# Altium PCB opm.PcbDoc (part 4 of 6)
Units mil, origin at the board's own origin, x right, y up, seen from the top; angles counter-clockwise.
Board outline 4280 x 1445 mil, 4 copper layers (Signal Plane 1, Ground, Power, Signal Plane 2), stack 59.778 mil thick; 104 components, 61 nets, 369 pads, 159 vias.
Unrouted connection lines stored in the file: 4.
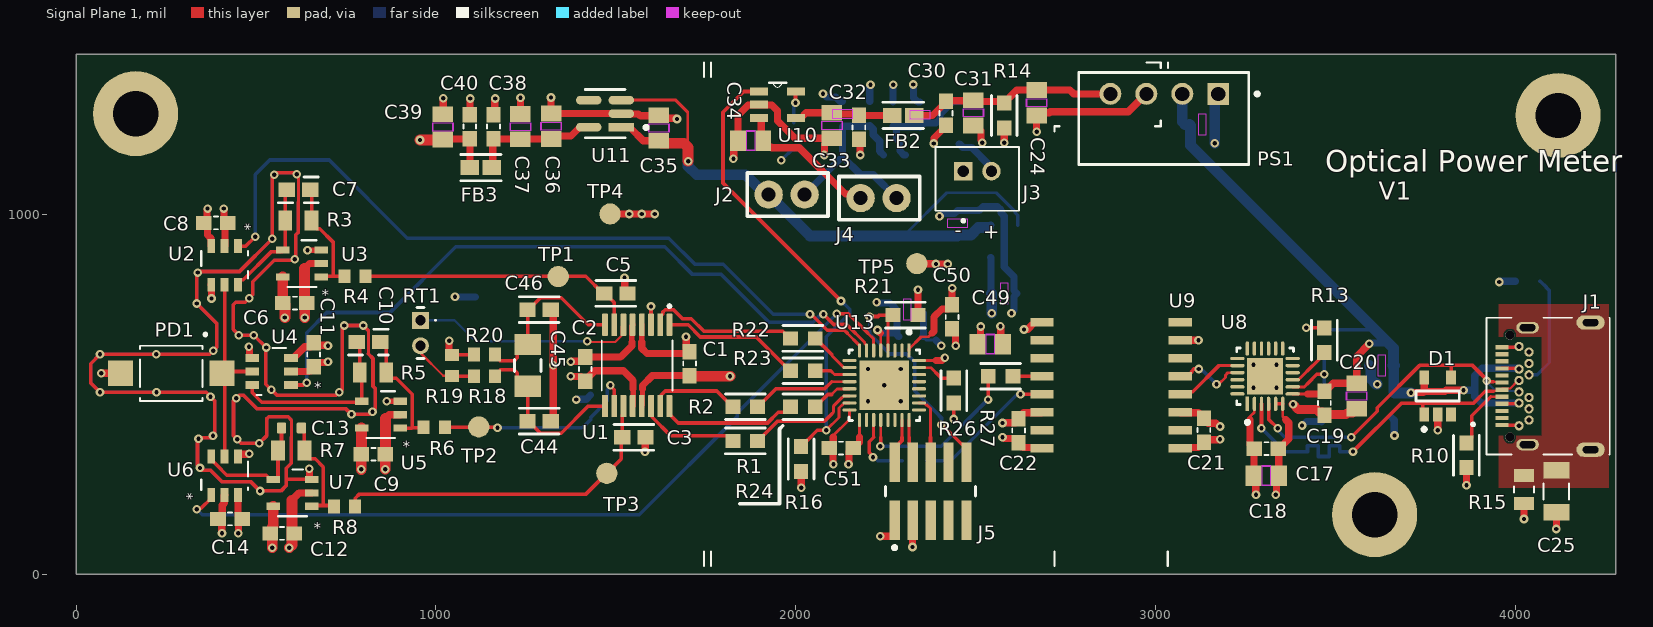
[diagram p0: Signal Plane 1 view]

## Part data (continued)
R12: library part RC0603FR-0747K5L, "100mW Thick Film Resistors 75V ±100ppm/℃ ±1% 47.5kΩ 0603 Chip Resistor - Surface Mount ROHS", Case Code (Imperial)=0603, Manufacturer="Yageo Group", Max Operating Temperature=155°C, Max Power Dissipation=100mW, Min Operating Temperature=-55°C, Supplier Part Number=311-47.5KHRCT-ND, Temperature Coefficient=100ppm/°C, Tolerance=1%, Voltage Rating=75V, Voltage Rating (DC)=50V, Case/Package=0603, Category="Chip SMD Resistors", China RoHS=Non-Compliant, ComponentLink1Description=https://datasheet.octopart.com:443/RC0603FR-0747K5L-Yageo-datasheet-175887523.pdf?src-supplier=IHS, ComponentLink1URL=https://datasheet.octopart.com:443/RC0603FR-0747K5L-Yageo-datasheet-175887523.pdf?src-supplier=IHS, ComponentLink2Description=https://datasheet.octopart.com:443/RC0603FR-0747K5L-Yageo-datasheet-103092701.pdf?src-supplier=Upverter, ComponentLink2URL=https://datasheet.octopart.com:443/RC0603FR-0747K5L-Yageo-datasheet-103092701.pdf?src-supplier=Upverter, ComponentLink3Description=https://datasheet.octopart.com:443/RC0603FR-0747K5L-Yageo-Group-datasheet-190305687.pdf?src-supplier=Newark, ComponentLink3URL=https://datasheet.octopart.com:443/RC0603FR-0747K5L-Yageo-Group-datasheet-190305687.pdf?src-supplier=Newark, ComponentLink4Description=https://datasheet.octopart.com:443/RC0603FR-0747K5L-Yageo-datasheet-8328172.pdf?src-supplier=Farnell, ComponentLink4URL=https://datasheet.octopart.com:443/RC0603FR-0747K5L-Yageo-datasheet-8328172.pdf?src-supplier=Farnell, ComponentLink5Description=https://datasheet.octopart.com:443/RC0603FR-0747K5L-Yageo-datasheet-62067350.pdf?src-supplier=Farnell, ComponentLink5URL=https://datasheet.octopart.com:443/RC0603FR-0747K5L-Yageo-datasheet-62067350.pdf?src-supplier=Farnell, ComponentLink6Description=https://datasheet.octopart.com:443/RC0603FR-0747K5L-Yageo-datasheet-34211833.pdf?src-supplier=element14+APAC, ComponentLink6URL=https://datasheet.octopart.com:443/RC0603FR-0747K5L-Yageo-datasheet-34211833.pdf?src-supplier=element14+APAC, ComponentLink7Description=https://datasheet.octopart.com:443/RC0603FR-0747K5L-Yageo-Group-datasheet-176638170.pdf?src-supplier=Future+Electronics, ComponentLink7URL=https://datasheet.octopart.com:443/RC0603FR-0747K5L-Yageo-Group-datasheet-176638170.pdf?src-supplier=Future+Electronics, ComponentLink8Description=https://datasheet.octopart.com:443/RC0603FR-0747K5L-Yageo-datasheet-164759695.pdf?src-supplier=Future+Electronics, ComponentLink8URL=https://datasheet.octopart.com:443/RC0603FR-0747K5L-Yageo-datasheet-164759695.pdf?src-supplier=Future+Electronics, ComponentLink9Description=https://datasheet.octopart.com:443/RC0603FR-0747K5L-Yageo-datasheet-137700087.pdf?src-supplier=Future+Electronics, ComponentLink9URL=https://datasheet.octopart.com:443/RC0603FR-0747K5L-Yageo-datasheet-137700087.pdf?src-supplier=Future+Electronics, ComponentLink10Description=https://datasheet.octopart.com:443/RC0603FR-0747K5L-Yageo-datasheet-27584510.pdf?src-supplier=Future+Electronics, ComponentLink10URL=https://datasheet.octopart.com:443/RC0603FR-0747K5L-Yageo-datasheet-27584510.pdf?src-supplier=Future+Electronics, ComponentLink11Description=https://datasheet.octopart.com:443/RC0603FR-0747K5L-Yageo-datasheet-15599030.pdf?src-supplier=Future+Electronics, ComponentLink11URL=https://datasheet.octopart.com:443/RC0603FR-0747K5L-Yageo-datasheet-15599030.pdf?src-supplier=Future+Electronics, ComponentLink12Description=https://datasheet.octopart.com:443/RC0603FR-0747K5L-Yageo-datasheet-12596169.pdf?src-supplier=Future+Electronics, ComponentLink12URL=https://datasheet.octopart.com:443/RC0603FR-0747K5L-Yageo-datasheet-12596169.pdf?src-supplier=Future+Electronics, ComponentLink13Description=https://datasheet.octopart.com:443/RC0603FR-0747K5L-Yageo-datasheet-503470.pdf?src-supplier=Future+Electronics, ComponentLink13URL=https://datasheet.octopart.com:443/RC0603FR-0747K5L-Yageo-datasheet-503470.pdf?src-supplier=Future+Electronics, ComponentLink14Description=https://datasheet.octopart.com:443/RC0603FR-0747K5L-Yageo-datasheet-148775077.pdf?src-supplier=TME, ComponentLink14URL=https://datasheet.octopart.com:443/RC0603FR-0747K5L-Yageo-datasheet-148775077.pdf?src-supplier=TME, ComponentLink15Description=https://datasheet.octopart.com/RC0603FR-0747K5L-Yageo-datasheet-73766026.pdf, ComponentLink15URL=https://datasheet.octopart.com/RC0603FR-0747K5L-Yageo-datasheet-73766026.pdf, ComponentLink16Description=https://datasheet.octopart.com:443/RC0603FR-0747K5L-Yageo-datasheet-118562.pdf?src-supplier=DigiKey, ComponentLink16URL=https://datasheet.octopart.com:443/RC0603FR-0747K5L-Yageo-datasheet-118562.pdf?src-supplier=DigiKey, ComponentLink17Description=http://sigma.octopart.com:80/conflict_mineral_statement/Yageo-company-3.pdf?src-supplier=Compliance+Statements, ComponentLink17URL=http://sigma.octopart.com:80/conflict_mineral_statement/Yageo-company-3.pdf?src-supplier=Compliance+Statements, ComponentLink18Description=http://sigma.octopart.com:80/rohs_statement/Yageo-company-2.pdf?src-supplier=Compliance+Statements, ComponentLink18URL=http://sigma.octopart.com:80/rohs_statement/Yageo-company-2.pdf?src-supplier=Compliance+Statements, Composition="Thick Film", Country of Origin="Mainland China, Taiwan", Depth=800µm, Export Control Classification Number (ECCN) Code=EAR99, Features="Moisture Resistant", Harmonized Tariff Schedule (HTS) Code=8533.21.00.30, Height=450µm, Introduction Date=2004-09-22, Lead Free="Lead Free", Length=1.6mm, Lifecycle Status=Production, Manufacturer Part Number=RC0603FR-0747K5L, Military Standard=Not, Mounting Technology="Surface Mount", Number of Terminals=2, Number of Terminations=2, Packaging="Tape & Reel", Pins=2, Power Dissipation=100mW, Power Rating=100mW, Pricing="1=0.11, 10=0.008, 25=0.0076, 50=0.0072, 100=0.0068, 250=0.00568 (USD)", REACH SVHC=Yes, RoHS=Compliant, Schedule B="8533210045, 8533210045|8533210045|8533210045|8533210045|8533210045|8533210045|8533210045|8533210045|8533210045|8533210045|8533210045|8533210045|8533210045|8533210045|8533210045, 8533210045|8533210045|8533210045|8533210045|8533210045|8533210045|8533210045|8533210045|8533210045|8533210045|8533210045|8533210045|8533210045|8533210045|8533210045|8533210045, 8533210045|8533210045|8533210045|8533210045|8533210045|8533210045|8533210045|8533210045|8533210045|8533210045|8533210045|8533210045|8533210045|8533210045|8533210045|8533210045|8533210045", Stock=42231, Supplier=DigiKey, Supplier 1=DigiKey, Supplier Part Number 1=311-47.5KHRCT-ND, Termination=SMD/SMT, Width=800µm, Working Voltage=75V
R13 R14: library part RC0603FR-071KL, "100mW Thick Film Resistors 75V ±100ppm/℃ ±1% 1kΩ 0603 Chip Resistor - Surface Mount ROHS", Case Code (Imperial)=0603, Manufacturer="Yageo Group", Max Operating Temperature=155°C, Min Operating Temperature=-55°C, Power Dissipation=100mW, Supplier Part Number=311-1.00KHRCT-ND, Temperature Coefficient=100ppm/°C, Tolerance=1%, Voltage Rating=50V, Working Voltage=75V, Case Code (Metric)=0603, Case/Package=0603, Category="Chip SMD Resistors", China RoHS=Non-Compliant, ComponentLink1Description=https://datasheet.octopart.com:443/RC0603FR-071KL-Yageo-datasheet-175887523.pdf?src-supplier=Newark, ComponentLink1URL=https://datasheet.octopart.com:443/RC0603FR-071KL-Yageo-datasheet-175887523.pdf?src-supplier=Newark, ComponentLink2Description=https://datasheet.octopart.com:443/RC0603FR-071KL-Yageo-datasheet-34211833.pdf?src-supplier=Newark, ComponentLink2URL=https://datasheet.octopart.com:443/RC0603FR-071KL-Yageo-datasheet-34211833.pdf?src-supplier=Newark, ComponentLink3Description=https://datasheet.octopart.com:443/RC0603FR-071KL-Yageo-datasheet-12596169.pdf?src-supplier=Newark, ComponentLink3URL=https://datasheet.octopart.com:443/RC0603FR-071KL-Yageo-datasheet-12596169.pdf?src-supplier=Newark, ComponentLink4Description=https://datasheet.octopart.com:443/RC0603FR-071KL-Yageo-datasheet-499455.pdf?src-supplier=Newark, ComponentLink4URL=https://datasheet.octopart.com:443/RC0603FR-071KL-Yageo-datasheet-499455.pdf?src-supplier=Newark, ComponentLink5Description=https://datasheet.octopart.com:443/RC0603FR-071KL-Yageo-datasheet-503470.pdf?src-supplier=Newark, ComponentLink5URL=https://datasheet.octopart.com:443/RC0603FR-071KL-Yageo-datasheet-503470.pdf?src-supplier=Newark, ComponentLink6Description=https://datasheet.octopart.com:443/RC0603FR-071KL-Yageo-datasheet-62067350.pdf?src-supplier=element14+APAC, ComponentLink6URL=https://datasheet.octopart.com:443/RC0603FR-071KL-Yageo-datasheet-62067350.pdf?src-supplier=element14+APAC, ComponentLink7Description=https://datasheet.octopart.com:443/RC0603FR-071KL-Yageo-datasheet-21426514.pdf?src-supplier=element14+APAC, ComponentLink7URL=https://datasheet.octopart.com:443/RC0603FR-071KL-Yageo-datasheet-21426514.pdf?src-supplier=element14+APAC, ComponentLink8Description=https://datasheet.octopart.com:443/RC0603FR-071KL-Yageo-datasheet-141265859.pdf?src-supplier=Upverter, ComponentLink8URL=https://datasheet.octopart.com:443/RC0603FR-071KL-Yageo-datasheet-141265859.pdf?src-supplier=Upverter, ComponentLink9Description=https://datasheet.octopart.com:443/RC0603FR-071KL-Yageo-datasheet-103092701.pdf?src-supplier=Upverter, ComponentLink9URL=https://datasheet.octopart.com:443/RC0603FR-071KL-Yageo-datasheet-103092701.pdf?src-supplier=Upverter, ComponentLink10Description=https://sigma.octopart.com:443/138820526/technical_drawing/Yageo-RC0603FR-071KL.pdf?src-supplier=Upverter, ComponentLink10URL=https://sigma.octopart.com:443/138820526/technical_drawing/Yageo-RC0603FR-071KL.pdf?src-supplier=Upverter, ComponentLink11Description=https://datasheet.octopart.com:443/RC0603FR-071KL-Yageo-datasheet-68297981.pdf?src-supplier=Upverter, ComponentLink11URL=https://datasheet.octopart.com:443/RC0603FR-071KL-Yageo-datasheet-68297981.pdf?src-supplier=Upverter, ComponentLink12Description=https://datasheet.octopart.com:443/RC0603FR-071KL-Yageo-datasheet-8328172.pdf?src-supplier=Farnell, ComponentLink12URL=https://datasheet.octopart.com:443/RC0603FR-071KL-Yageo-datasheet-8328172.pdf?src-supplier=Farnell, ComponentLink13Description=https://datasheet.octopart.com:443/RC0603FR-071KL-Yageo-datasheet-13691069.pdf?src-supplier=Farnell, ComponentLink13URL=https://datasheet.octopart.com:443/RC0603FR-071KL-Yageo-datasheet-13691069.pdf?src-supplier=Farnell, ComponentLink14Description=https://datasheet.octopart.com:443/RC0603FR-071KL-Yageo-datasheet-15599030.pdf?src-supplier=Seeed+Studio, ComponentLink14URL=https://datasheet.octopart.com:443/RC0603FR-071KL-Yageo-datasheet-15599030.pdf?src-supplier=Seeed+Studio, ComponentLink15Description=https://datasheet.octopart.com:443/RC0603FR-071KL-Yageo-Group-datasheet-176638170.pdf?src-supplier=Future+Electronics, ComponentLink15URL=https://datasheet.octopart.com:443/RC0603FR-071KL-Yageo-Group-datasheet-176638170.pdf?src-supplier=Future+Electronics, ComponentLink16Description=https://datasheet.octopart.com:443/RC0603FR-071KL-Yageo-datasheet-164759695.pdf?src-supplier=Future+Electronics, ComponentLink16URL=https://datasheet.octopart.com:443/RC0603FR-071KL-Yageo-datasheet-164759695.pdf?src-supplier=Future+Electronics, ComponentLink17Description=https://datasheet.octopart.com:443/RC0603FR-071KL-Yageo-datasheet-137700087.pdf?src-supplier=Future+Electronics, ComponentLink17URL=https://datasheet.octopart.com:443/RC0603FR-071KL-Yageo-datasheet-137700087.pdf?src-supplier=Future+Electronics, ComponentLink18Description=https://datasheet.octopart.com:443/RC0603FR071KL-Yageo-datasheet-27584510.pdf?src-supplier=Future+Electronics, ComponentLink18URL=https://datasheet.octopart.com:443/RC0603FR071KL-Yageo-datasheet-27584510.pdf?src-supplier=Future+Electronics, ComponentLink19Description=https://datasheet.octopart.com:443/RC0603FR-071KL-Yageo-datasheet-8324193.pdf?src-supplier=Future+Electronics, ComponentLink19URL=https://datasheet.octopart.com:443/RC0603FR-071KL-Yageo-datasheet-8324193.pdf?src-supplier=Future+Electronics, ComponentLink20Description=https://datasheet.octopart.com:443/RC0603FR-071KL-Yageo-datasheet-79472498.pdf?src-supplier=Megastar, ComponentLink20URL=https://datasheet.octopart.com:443/RC0603FR-071KL-Yageo-datasheet-79472498.pdf?src-supplier=Megastar, ComponentLink21Description=https://datasheet.octopart.com/RC0603FR-071KL-Yageo-datasheet-73766026.pdf, ComponentLink21URL=https://datasheet.octopart.com/RC0603FR-071KL-Yageo-datasheet-73766026.pdf, ComponentLink22Description=https://datasheet.octopart.com:443/RC0603FR-071KL-Yageo-datasheet-118562.pdf?src-supplier=DigiKey, ComponentLink22URL=https://datasheet.octopart.com:443/RC0603FR-071KL-Yageo-datasheet-118562.pdf?src-supplier=DigiKey, ComponentLink23Description=http://sigma.octopart.com:80/conflict_mineral_statement/Yageo-company-3.pdf?src-supplier=Compliance+Statements, ComponentLink23URL=http://sigma.octopart.com:80/conflict_mineral_statement/Yageo-company-3.pdf?src-supplier=Compliance+Statements, ComponentLink24Description=http://sigma.octopart.com:80/rohs_statement/Yageo-company-2.pdf?src-supplier=Compliance+Statements, ComponentLink24URL=http://sigma.octopart.com:80/rohs_statement/Yageo-company-2.pdf?src-supplier=Compliance+Statements, Composition="Thick Film", Contact Plating=Tin, Country of Origin="Mainland China, Taiwan", Depth=800µm, Export Control Classification Number (ECCN) Code=EAR99, Harmonized Tariff Schedule (HTS) Code=8533.21.00.30, Height=450µm, Introduction Date=2004-10-04, Lead Free="Lead Free", Length=1.6mm, Lifecycle Status=Production, Manufacturer Part Number=RC0603FR-071KL, Military Standard=Not, Mounting Technology="Surface Mount", Number of Terminals=2, Packaging="Tape and Reel", Pins=2, Power Rating=100mW, Pricing="1=0.1, 10=0.008, 25=0.0072, 50=0.0062, 100=0.0057, 5000=0.00204 (USD)", Radiation Hardening=No, REACH SVHC=Yes, RoHS=Compliant, Schedule B="8533210045, 8533210045|8533210045|8533210045|8533210045|8533210045|8533210045|8533210045|8533210045|8533210045|8533210045|8533210045|8533210045|8533210045|8533210045|8533210045|8533210045|8533210045|8533210045|8533210045|8533210045|8533210045|8533210045|8533210045|85", Stock=5298268, Supplier=DigiKey, Supplier 1=DigiKey, Supplier Part Number 1=311-1.00KHRCT-ND, Termination=SMD/SMT, Voltage Rating (DC)=50V, Width=800µm
R15: library part CRCW08051M00FKEA, "Res Thick Film 0805 1M Ohm 1% 0.125W(1/8W) +/-100ppm/ßC Pad SMD Automotive T/R", Case Code (Metric)=0805, Manufacturer=Vishay, Manufacturer Package Identifier=CRCW0805-e3, Max Operating Temperature=155°C, Min Operating Temperature=-55°C, Power Dissipation=125mW, Supplier Part Number=541-1.00MCCT-ND, Temperature Coefficient=100ppm/°C, Tolerance=1%, Voltage Rating=150V, Case/Package=0805, Category="Chip SMD Resistors", China RoHS=Non-Compliant, ComponentLink1Description=https://datasheet.octopart.com:443/CRCW08051M00FKEA-Vishay-datasheet-175423584.pdf?src-supplier=Newark, ComponentLink1URL=https://datasheet.octopart.com:443/CRCW08051M00FKEA-Vishay-datasheet-175423584.pdf?src-supplier=Newark, ComponentLink2Description=https://datasheet.octopart.com:443/CRCW08051M00FKEA-Vishay-datasheet-83961561.pdf?src-supplier=Newark, ComponentLink2URL=https://datasheet.octopart.com:443/CRCW08051M00FKEA-Vishay-datasheet-83961561.pdf?src-supplier=Newark, ComponentLink3Description=https://datasheet.octopart.com:443/CRCW08051M00FKEA-Vishay-datasheet-62317937.pdf?src-supplier=Newark, ComponentLink3URL=https://datasheet.octopart.com:443/CRCW08051M00FKEA-Vishay-datasheet-62317937.pdf?src-supplier=Newark, ComponentLink4Description=https://datasheet.octopart.com:443/CRCW08051M00FKEA-Vishay-datasheet-11516975.pdf?src-supplier=Newark, ComponentLink4URL=https://datasheet.octopart.com:443/CRCW08051M00FKEA-Vishay-datasheet-11516975.pdf?src-supplier=Newark, ComponentLink5Description=https://datasheet.octopart.com:443/CRCW08051M00FKEA-Vishay-datasheet-41302739.pdf?src-supplier=Newark, ComponentLink5URL=https://datasheet.octopart.com:443/CRCW08051M00FKEA-Vishay-datasheet-41302739.pdf?src-supplier=Newark, ComponentLink6Description=https://datasheet.octopart.com:443/CRCW08051M00FKEA-Vishay-datasheet-33013972.pdf?src-supplier=Newark, ComponentLink6URL=https://datasheet.octopart.com:443/CRCW08051M00FKEA-Vishay-datasheet-33013972.pdf?src-supplier=Newark, ComponentLink7Description=https://datasheet.octopart.com:443/CRCW08051M00FKEA-Vishay-datasheet-141435152.pdf?src-supplier=Upverter, ComponentLink7URL=https://datasheet.octopart.com:443/CRCW08051M00FKEA-Vishay-datasheet-141435152.pdf?src-supplier=Upverter, ComponentLink8Description=https://datasheet.octopart.com:443/CRCW08051M00FKEA-Vishay-datasheet-66077789.pdf?src-supplier=element14+APAC, ComponentLink8URL=https://datasheet.octopart.com:443/CRCW08051M00FKEA-Vishay-datasheet-66077789.pdf?src-supplier=element14+APAC, ComponentLink9Description=https://datasheet.octopart.com:443/CRCW08051M00FKEA-Vishay-datasheet-16179825.pdf?src-supplier=element14+APAC, ComponentLink9URL=https://datasheet.octopart.com:443/CRCW08051M00FKEA-Vishay-datasheet-16179825.pdf?src-supplier=element14+APAC, ComponentLink10Description=https://datasheet.octopart.com:443/CRCW08051M00FKEA-Vishay-datasheet-14722531.pdf?src-supplier=Farnell, ComponentLink10URL=https://datasheet.octopart.com:443/CRCW08051M00FKEA-Vishay-datasheet-14722531.pdf?src-supplier=Farnell, ComponentLink11Description=https://datasheet.octopart.com:443/CRCW08051M00FKEA-Vishay-datasheet-10882403.pdf?src-supplier=Farnell, ComponentLink11URL=https://datasheet.octopart.com:443/CRCW08051M00FKEA-Vishay-datasheet-10882403.pdf?src-supplier=Farnell, ComponentLink12Description=https://datasheet.octopart.com:443/CRCW08051M00FKEA-Vishay-datasheet-5300368.pdf?src-supplier=Future+Electronics, ComponentLink12URL=https://datasheet.octopart.com:443/CRCW08051M00FKEA-Vishay-datasheet-5300368.pdf?src-supplier=Future+Electronics, ComponentLink13Description=https://datasheet.octopart.com:443/CRCW08051M00FKEA-Vishay-datasheet-62316122.pdf?src-supplier=Future+Electronics, ComponentLink13URL=https://datasheet.octopart.com:443/CRCW08051M00FKEA-Vishay-datasheet-62316122.pdf?src-supplier=Future+Electronics, ComponentLink14Description=https://datasheet.octopart.com:443/CRCW08051M00FKEA-Vishay-Dale-datasheet-47688880.pdf?src-supplier=RS+(Formerly+Allied+Electronics), ComponentLink14URL=https://datasheet.octopart.com:443/CRCW08051M00FKEA-Vishay-Dale-datasheet-47688880.pdf?src-supplier=RS+(Formerly+Allied+Electronics), ComponentLink15Description=https://datasheet.octopart.com:443/CRCW08051M00FKEA-Vishay-datasheet-12001583.pdf?src-supplier=RS+(Formerly+Allied+Electronics), ComponentLink15URL=https://datasheet.octopart.com:443/CRCW08051M00FKEA-Vishay-datasheet-12001583.pdf?src-supplier=RS+(Formerly+Allied+Electronics), ComponentLink16Description=https://datasheet.octopart.com:443/CRCW08051M00FKEA-Vishay-datasheet-5306405.pdf?src-supplier=RS+(Formerly+Allied+Electronics), ComponentLink16URL=https://datasheet.octopart.com:443/CRCW08051M00FKEA-Vishay-datasheet-5306405.pdf?src-supplier=RS+(Formerly+Allied+Electronics), ComponentLink17Description=https://datasheet.octopart.com:443/CRCW08051M00FKEA-Vishay-datasheet-17834126.pdf?src-supplier=TME, ComponentLink17URL=https://datasheet.octopart.com:443/CRCW08051M00FKEA-Vishay-datasheet-17834126.pdf?src-supplier=TME, ComponentLink18Description=https://datasheet.octopart.com/D-CRCW-e3-Standard-Thick-Film-Chip-Resistors-Vishay-datasheet-family-64.pdf, ComponentLink18URL=https://datasheet.octopart.com/D-CRCW-e3-Standard-Thick-Film-Chip-Resistors-Vishay-datasheet-family-64.pdf, ComponentLink19Description=https://datasheet.octopart.com:443/CRCW08051M00FKEA-Vishay-datasheet-8445837.pdf?src-supplier=element14, ComponentLink19URL=https://datasheet.octopart.com:443/CRCW08051M00FKEA-Vishay-datasheet-8445837.pdf?src-supplier=element14, ComponentLink20Description=https://datasheet.octopart.com:443/CRCW08051M00FKEA-Vishay-datasheet-5377306.pdf?src-supplier=Garrett, ComponentLink20URL=https://datasheet.octopart.com:443/CRCW08051M00FKEA-Vishay-datasheet-5377306.pdf?src-supplier=Garrett, ComponentLink21Description=https://datasheet.octopart.com:443/CRCW08051M00FKEA-Vishay-datasheet-148188.pdf?src-supplier=Garrett, ComponentLink21URL=https://datasheet.octopart.com:443/CRCW08051M00FKEA-Vishay-datasheet-148188.pdf?src-supplier=Garrett, ComponentLink22Description=https://datasheet.octopart.com:443/CRCW08051M00FKEA-Vishay-datasheet-34203.pdf?src-supplier=Garrett, ComponentLink22URL=https://datasheet.octopart.com:443/CRCW08051M00FKEA-Vishay-datasheet-34203.pdf?src-supplier=Garrett, ComponentLink23Description=http://sigma.octopart.com:80/rohs_certificate/D-CRCW-e3-Standard-Thick-Film-Chip-Resistors-Vishay-family-102.pdf?src-supplier=Compliance+Statements, ComponentLink23URL=http://sigma.octopart.com:80/rohs_certificate/D-CRCW-e3-Standard-Thick-Film-Chip-Resistors-Vishay-family-102.pdf?src-supplier=Compliance+Statements, Composition="Thick Film", Country of Origin=Israel, Export Control Classification Number (ECCN) Code=EAR99, Harmonized Tariff Schedule (HTS) Code=8533.21.00.30, Height=450µm, Introduction Date=2005-02-16, Lead Free="Lead Free", Length=2mm, Lifecycle Status=Production, Manufacturer Part Number=CRCW08051M00FKEA, Mounting Technology="Surface Mount", Number of Terminals=2, Packaging="Cut Tape", Pins=2, Power Rating=125mW, Pricing="1=0.1, 10=0.041, 25=0.0312, 50=0.0256, 100=0.0212, 250=0.01692, 500=0.01448, 1000=0.01254 (USD)", REACH SVHC=Yes, RoHS=Compliant, Schedule B="8533210045, 8533210045|8533210045|8533210045|8533210045|8533210045|8533210045|8533210045|8533210045|8533210045|8533210045|8533210045|8533210045|8533210045|8533210045|8533210045|8533210045|8533210045|8533210045|8533210045|8533210045|8533210045|8533210045|8533210045|85", Stock=136752, Supplier=DigiKey, Supplier 1=Avnet, Supplier Part Number 1=CRCW08051M00FKEA, Voltage Rating (DC)=150V, Width=1.25mm, Working Voltage=150V
R16 R21 R26: library part RC0603FR-0710KL, "100mW Thick Film Resistors 75V ±100ppm/℃ ±1% 10kΩ 0603 Chip Resistor - Surface Mount ROHS", Case Code (Imperial)=0603, Manufacturer="Yageo Group", Max Operating Temperature=155°C, Min Operating Temperature=-55°C, Power Dissipation=100mW, Supplier Part Number=311-10.0KHRCT-ND, Temperature Coefficient=100ppm/°C, Tolerance=1%, Voltage Rating=75V, Voltage Rating (DC)=50V, Case Code (Metric)=0603, Case/Package=0603, Category="Chip SMD Resistors", China RoHS=Non-Compliant, ComponentLink1Description=https://datasheet.octopart.com:443/RC0603FR-0710KL-Yageo-datasheet-175887523.pdf?src-supplier=IHS, ComponentLink1URL=https://datasheet.octopart.com:443/RC0603FR-0710KL-Yageo-datasheet-175887523.pdf?src-supplier=IHS, ComponentLink2Description=https://datasheet.octopart.com:443/RC0603FR-0710KL-Yageo-datasheet-103092701.pdf?src-supplier=Upverter, ComponentLink2URL=https://datasheet.octopart.com:443/RC0603FR-0710KL-Yageo-datasheet-103092701.pdf?src-supplier=Upverter, ComponentLink3Description=https://datasheet.octopart.com:443/RC0603FR-0710KL-Yageo-datasheet-98239111.pdf?src-supplier=Upverter, ComponentLink3URL=https://datasheet.octopart.com:443/RC0603FR-0710KL-Yageo-datasheet-98239111.pdf?src-supplier=Upverter, ComponentLink4Description=https://datasheet.octopart.com:443/RC0603FR-0710KL-Yageo-datasheet-141265859.pdf?src-supplier=Upverter, ComponentLink4URL=https://datasheet.octopart.com:443/RC0603FR-0710KL-Yageo-datasheet-141265859.pdf?src-supplier=Upverter, ComponentLink5Description=https://sigma.octopart.com:443/138820526/technical_drawing/Yageo-RC0603FR-0710KL.pdf?src-supplier=Upverter, ComponentLink5URL=https://sigma.octopart.com:443/138820526/technical_drawing/Yageo-RC0603FR-0710KL.pdf?src-supplier=Upverter, ComponentLink6Description=https://datasheet.octopart.com:443/RC0603FR-0710KL-Yageo-datasheet-8328172.pdf?src-supplier=Farnell, ComponentLink6URL=https://datasheet.octopart.com:443/RC0603FR-0710KL-Yageo-datasheet-8328172.pdf?src-supplier=Farnell, ComponentLink7Description=https://datasheet.octopart.com:443/RC0603FR-0710KL-Yageo-datasheet-13691069.pdf?src-supplier=Farnell, ComponentLink7URL=https://datasheet.octopart.com:443/RC0603FR-0710KL-Yageo-datasheet-13691069.pdf?src-supplier=Farnell, ComponentLink8Description=https://datasheet.octopart.com:443/RC0603FR-0710KL-Yageo-datasheet-62067350.pdf?src-supplier=element14+APAC, ComponentLink8URL=https://datasheet.octopart.com:443/RC0603FR-0710KL-Yageo-datasheet-62067350.pdf?src-supplier=element14+APAC, ComponentLink9Description=https://datasheet.octopart.com:443/RC0603FR-0710KL-Yageo-datasheet-17842380.pdf?src-supplier=element14+APAC, ComponentLink9URL=https://datasheet.octopart.com:443/RC0603FR-0710KL-Yageo-datasheet-17842380.pdf?src-supplier=element14+APAC, ComponentLink10Description=https://datasheet.octopart.com:443/RC0603FR-0710KL-Yageo-datasheet-15599030.pdf?src-supplier=Future+Electronics, ComponentLink10URL=https://datasheet.octopart.com:443/RC0603FR-0710KL-Yageo-datasheet-15599030.pdf?src-supplier=Future+Electronics, ComponentLink11Description=https://datasheet.octopart.com:443/RC0603FR-0710KL-Yageo-Group-datasheet-176638170.pdf?src-supplier=Future+Electronics, ComponentLink11URL=https://datasheet.octopart.com:443/RC0603FR-0710KL-Yageo-Group-datasheet-176638170.pdf?src-supplier=Future+Electronics, ComponentLink12Description=https://datasheet.octopart.com:443/RC0603FR-0710KL-Yageo-datasheet-164759695.pdf?src-supplier=Future+Electronics, ComponentLink12URL=https://datasheet.octopart.com:443/RC0603FR-0710KL-Yageo-datasheet-164759695.pdf?src-supplier=Future+Electronics, ComponentLink13Description=https://datasheet.octopart.com:443/RC0603FR-0710KL-Yageo-datasheet-127823281.pdf?src-supplier=Future+Electronics, ComponentLink13URL=https://datasheet.octopart.com:443/RC0603FR-0710KL-Yageo-datasheet-127823281.pdf?src-supplier=Future+Electronics, ComponentLink14Description=https://datasheet.octopart.com:443/RC0603FR-0710KL-Yageo-datasheet-137700087.pdf?src-supplier=Future+Electronics, ComponentLink14URL=https://datasheet.octopart.com:443/RC0603FR-0710KL-Yageo-datasheet-137700087.pdf?src-supplier=Future+Electronics, ComponentLink15Description=https://datasheet.octopart.com:443/RC0603FR-0710KL-Yageo-datasheet-27584510.pdf?src-supplier=Future+Electronics, ComponentLink15URL=https://datasheet.octopart.com:443/RC0603FR-0710KL-Yageo-datasheet-27584510.pdf?src-supplier=Future+Electronics, ComponentLink16Description=https://datasheet.octopart.com:443/RC0603FR-0710KL-Yageo-datasheet-8324193.pdf?src-supplier=Future+Electronics, ComponentLink16URL=https://datasheet.octopart.com:443/RC0603FR-0710KL-Yageo-datasheet-8324193.pdf?src-supplier=Future+Electronics, ComponentLink17Description=https://datasheet.octopart.com:443/RC0603FR-0710KL-Yageo-datasheet-12596169.pdf?src-supplier=Newark, ComponentLink17URL=https://datasheet.octopart.com:443/RC0603FR-0710KL-Yageo-datasheet-12596169.pdf?src-supplier=Newark, ComponentLink18Description=https://datasheet.octopart.com:443/RC0603FR-0710KL-Yageo-datasheet-503470.pdf?src-supplier=Newark, ComponentLink18URL=https://datasheet.octopart.com:443/RC0603FR-0710KL-Yageo-datasheet-503470.pdf?src-supplier=Newark, ComponentLink19Description=https://datasheet.octopart.com:443/RC0603FR-0710KL-Yageo-datasheet-34211833.pdf?src-supplier=Newark, ComponentLink19URL=https://datasheet.octopart.com:443/RC0603FR-0710KL-Yageo-datasheet-34211833.pdf?src-supplier=Newark, ComponentLink20Description=https://datasheet.octopart.com:443/RC0603FR-0710KL-Yageo-datasheet-79472498.pdf?src-supplier=Megastar, ComponentLink20URL=https://datasheet.octopart.com:443/RC0603FR-0710KL-Yageo-datasheet-79472498.pdf?src-supplier=Megastar, ComponentLink21Description=https://datasheet.octopart.com/RC0603FR-0710KL-Yageo-datasheet-73766026.pdf, ComponentLink21URL=https://datasheet.octopart.com/RC0603FR-0710KL-Yageo-datasheet-73766026.pdf, ComponentLink22Description=https://datasheet.octopart.com:443/RC0603FR-0710KL-Yageo-datasheet-118562.pdf?src-supplier=DigiKey, ComponentLink22URL=https://datasheet.octopart.com:443/RC0603FR-0710KL-Yageo-datasheet-118562.pdf?src-supplier=DigiKey, ComponentLink23Description=http://sigma.octopart.com:80/conflict_mineral_statement/Yageo-company-3.pdf?src-supplier=Compliance+Statements, ComponentLink23URL=http://sigma.octopart.com:80/conflict_mineral_statement/Yageo-company-3.pdf?src-supplier=Compliance+Statements, ComponentLink24Description=http://sigma.octopart.com:80/rohs_statement/Yageo-company-2.pdf?src-supplier=Compliance+Statements, ComponentLink24URL=http://sigma.octopart.com:80/rohs_statement/Yageo-company-2.pdf?src-supplier=Compliance+Statements, Composition="Thick Film", Depth=800µm, Height=450µm, Lead Free="Lead Free", Lead Pitch=300µm, Length=1.6mm, Lifecycle Status=Production, Manufacturer Part Number=RC0603FR-0710KL, Military Standard=Not, Mounting Technology="Surface Mount", Number of Terminals=2, Packaging="Tape & Reel", Pins=2, Power Rating=100mW, Pricing="1=0.1, 10=0.010, 25=0.0088, 50=0.0072, 100=0.0066, 250=0.00568 (USD)", REACH SVHC=Yes, RoHS=Compliant, Schedule B="8533210045, 8533210045|8533210045|8533210045|8533210045|8533210045|8533210045|8533210045|8533210045|8533210045|8533210045|8533210045|8533210045|8533210045|8533210045|8533210045|8533210045|8533210045|8533210045|8533210045|8533210045|8533210045|8533210045|8533210045|85", Stock=4661379, Supplier=DigiKey, Supplier 1=DigiKey, Supplier Part Number 1=311-10.0KHRCT-ND, Termination=SMD/SMT, Weight=2.012816mg, Width=800µm, Working Voltage=75V
R19: library part TNPW0603100KBXEN, "Fixed Resistor, Thin Film, 0.1W, 100000ohm, 75V, 0.1% +/-Tol, 15ppm/Cel, Surface Mount, 0603", Case Code (Imperial)=0603, Case Code (Metric)=1608, Manufacturer=Vishay, Max Operating Temperature=125°C, Max Power Dissipation=100mW, Min Operating Temperature=-55°C, Supplier Part Number=541-1721-1-ND, Temperature Coefficient=15ppm/°C, Tolerance=0.1%, Working Voltage=75V, Case/Package=0603, Category="Chip SMD Resistors", China RoHS=Compliant, ComponentLink1Description=https://datasheet.octopart.com:443/TNPW0603100KBXEN-Vishay-datasheet-170520403.pdf?src-supplier=IHS, ComponentLink1URL=https://datasheet.octopart.com:443/TNPW0603100KBXEN-Vishay-datasheet-170520403.pdf?src-supplier=IHS, ComponentLink2Description=https://datasheet.octopart.com:443/TNPW0603100KBXEN-Vishay-Dale-datasheet-182026744.pdf?src-supplier=IHS, ComponentLink2URL=https://datasheet.octopart.com:443/TNPW0603100KBXEN-Vishay-Dale-datasheet-182026744.pdf?src-supplier=IHS, ComponentLink3Description=https://datasheet.octopart.com:443/TNPW0603100KBXEN-Vishay-datasheet-79783896.pdf?src-supplier=Future+Electronics, ComponentLink3URL=https://datasheet.octopart.com:443/TNPW0603100KBXEN-Vishay-datasheet-79783896.pdf?src-supplier=Future+Electronics, ComponentLink4Description=https://datasheet.octopart.com/TNPW0603100KBXEN-Vishay-datasheet-13498837.pdf, ComponentLink4URL=https://datasheet.octopart.com/TNPW0603100KBXEN-Vishay-datasheet-13498837.pdf, ComponentLink5Description=https://datasheet.octopart.com/TNPW0603100KBXEN-Vishay-datasheet-13414878.pdf, ComponentLink5URL=https://datasheet.octopart.com/TNPW0603100KBXEN-Vishay-datasheet-13414878.pdf, ComponentLink6Description=https://datasheet.octopart.com/TNPW0603100KBXEN-Vishay-datasheet-13295955.pdf, ComponentLink6URL=https://datasheet.octopart.com/TNPW0603100KBXEN-Vishay-datasheet-13295955.pdf, ComponentLink7Description=https://datasheet.octopart.com/TNPW0603100KBXEN-Vishay-datasheet-13196373.pdf, ComponentLink7URL=https://datasheet.octopart.com/TNPW0603100KBXEN-Vishay-datasheet-13196373.pdf, ComponentLink8Description=https://datasheet.octopart.com/TNPW0603100KBXEN-Vishay-datasheet-13143890.pdf, ComponentLink8URL=https://datasheet.octopart.com/TNPW0603100KBXEN-Vishay-datasheet-13143890.pdf, ComponentLink9Description=https://datasheet.octopart.com/TNPW0603100KBXEN-Vishay-datasheet-13081780.pdf, ComponentLink9URL=https://datasheet.octopart.com/TNPW0603100KBXEN-Vishay-datasheet-13081780.pdf, ComponentLink10Description=https://datasheet.octopart.com/TNPW0603100KBXEN-Vishay-datasheet-13052401.pdf, ComponentLink10URL=https://datasheet.octopart.com/TNPW0603100KBXEN-Vishay-datasheet-13052401.pdf, ComponentLink11Description=https://datasheet.octopart.com/TNPW0603100KBXEN-Vishay-datasheet-13034137.pdf, ComponentLink11URL=https://datasheet.octopart.com/TNPW0603100KBXEN-Vishay-datasheet-13034137.pdf, ComponentLink12Description=https://datasheet.octopart.com/TNPW0603100KBXEN-Vishay-datasheet-12585086.pdf, ComponentLink12URL=https://datasheet.octopart.com/TNPW0603100KBXEN-Vishay-datasheet-12585086.pdf, ComponentLink13Description=https://datasheet.octopart.com/TNPW0603100KBXEN-Vishay-datasheet-12543131.pdf, ComponentLink13URL=https://datasheet.octopart.com/TNPW0603100KBXEN-Vishay-datasheet-12543131.pdf, ComponentLink14Description=https://datasheet.octopart.com/TNPW0603100KBXEN-Vishay-datasheet-12532511.pdf, ComponentLink14URL=https://datasheet.octopart.com/TNPW0603100KBXEN-Vishay-datasheet-12532511.pdf, ComponentLink15Description=https://datasheet.octopart.com/TNPW0603100KBXEN-Vishay-datasheet-12519971.pdf, ComponentLink15URL=https://datasheet.octopart.com/TNPW0603100KBXEN-Vishay-datasheet-12519971.pdf, ComponentLink16Description=https://datasheet.octopart.com/TNPW0603100KBXEN-Vishay-datasheet-12509767.pdf, ComponentLink16URL=https://datasheet.octopart.com/TNPW0603100KBXEN-Vishay-datasheet-12509767.pdf, ComponentLink17Description=https://datasheet.octopart.com/TNPW0603100KBXEN-Vishay-datasheet-12365287.pdf, ComponentLink17URL=https://datasheet.octopart.com/TNPW0603100KBXEN-Vishay-datasheet-12365287.pdf, ComponentLink18Description=https://datasheet.octopart.com/TNPW0603100KBXEN-Vishay-datasheet-10854096.pdf, ComponentLink18URL=https://datasheet.octopart.com/TNPW0603100KBXEN-Vishay-datasheet-10854096.pdf, ComponentLink19Description=https://datasheet.octopart.com/TNPW0603100KBXEN-Vishay-datasheet-10678752.pdf, ComponentLink19URL=https://datasheet.octopart.com/TNPW0603100KBXEN-Vishay-datasheet-10678752.pdf, ComponentLink20Description=https://datasheet.octopart.com/TNPW0603100KBXEN-Vishay-datasheet-10283461.pdf, ComponentLink20URL=https://datasheet.octopart.com/TNPW0603100KBXEN-Vishay-datasheet-10283461.pdf, ComponentLink21Description=https://datasheet.octopart.com/TNPW0603100KBXEN-Vishay-datasheet-10185418.pdf, ComponentLink21URL=https://datasheet.octopart.com/TNPW0603100KBXEN-Vishay-datasheet-10185418.pdf, ComponentLink22Description=https://datasheet.octopart.com/TNPW0603100KBXEN-Vishay-datasheet-10055244.pdf, ComponentLink22URL=https://datasheet.octopart.com/TNPW0603100KBXEN-Vishay-datasheet-10055244.pdf, ComponentLink23Description=http://sigma.octopart.com:80/rohs_statement/Vishay-company-15.pdf?src-supplier=Compliance+Statements, ComponentLink23URL=http://sigma.octopart.com:80/rohs_statement/Vishay-company-15.pdf?src-supplier=Compliance+Statements, Composition="Thin Film", Contact Plating=Tin, Depth=850µm, Features="Anti-Sulfur, Automotive AEC-Q200, Moisture Resistant", Height=450µm, Length=1.6002mm, Lifecycle Status=Production, Manufacturer Part Number=TNPW0603100KBXEN, Military Standard=Not, Mounting Technology="Surface Mount", Number of Terminals=2, Number of Terminations=2, Packaging=Digi-Reel®, Power Dissipation=100mW, Power Rating=100mW, Pricing="1=0.67, 10=0.559, 25=0.5184, 50=0.49, 100=0.4637, 250=0.43236, 500=0.41122 (USD)", Radiation Hardening=No, REACH SVHC=Yes, RoHS=Compliant, Schedule B="8533210045, 8533210045|8533210045|8533210045|8533210045|8533210045", Stock=1476, Supplier=DigiKey, Supplier 1=DigiKey, Supplier Part Number 1=541-1721-1-ND, Width=850µm
RT1: library part 104JT-025, "NTC Thermistor, 100000ohm, Through Hole Mount", Manufacturer=Semitec, Max Operating Temperature=125°C, Min Operating Temperature=-50°C, Power Dissipation=3.5mW, Supplier Part Number=4316-104JT-025-ND, Tolerance=1%, Category=Resistors, ComponentLink1Description=https://datasheet.octopart.com:443/104JT-025-Semitec-datasheet-182147835.pdf?src-supplier=IHS, ComponentLink1URL=https://datasheet.octopart.com:443/104JT-025-Semitec-datasheet-182147835.pdf?src-supplier=IHS, Export Control Classification Number (ECCN) Code=EAR99, Harmonized Tariff Schedule (HTS) Code=8533.40.80.70, Manufacturer Part Number=104JT-025, Number of Terminals=2, Pricing="1=0.64, 5=0.558, 10=0.529, 25=0.4936, 50=0.4696, 100=0.4477, 500=0.40388, 1000=0.38759, 5000=0.35483 (USD)", RoHS=Compliant, Stock=475, Supplier=DigiKey, Supplier 1=DigiKey, Supplier Part Number 1=4316-104JT-025-ND
U1: "Single ADC Delta-Sigma 2ksps 24-bit Serial (5-Wire, 4-Wire, 3-Wire, SPI) 16-Pin TSSOP T/R", Case/Package=TSSOP, Manufacturer="Texas Instruments", Manufacturer Lifecycle Status=ACTIVE, Max Operating Temperature=125°C, Max Power Dissipation=1.4mW, Max Supply Voltage=5.5V, Min Operating Temperature=-40°C, Min Supply Voltage=2.3V, Operating Supply Voltage=3.3V, Power Dissipation=2.1mW, Supplier Part Number=296-39851-1-ND, Category="Analog to Digital Converters (ADCs)", ComponentLink1Description=https://sigma.octopart.com:443/189718192/technical_drawing/Texas-Instruments-ADS1220IPWR.pdf?src-supplier=Texas+Instruments, ComponentLink1URL=https://sigma.octopart.com:443/189718192/technical_drawing/Texas-Instruments-ADS1220IPWR.pdf?src-supplier=Texas+Instruments, ComponentLink2Description=https://octopart.com:443/opatz8j6/c1?t=6PgF7JLWIi22LldaOU7M9y1v-cYg4Zx7_3q84e-aqucDQscnjc-S0rbNCtxfrj18GP6nvaPS8hKq6fMUxCIswLCbG2-dvnYJuWgl1rq_FtcofGa7EIOjUhmxvGKxA7uk6K91NUMs9UXrS0ReJ-JcvGY3bGLvGZ5rREyppGIXq450cGXR3FmMwE-n39kOiK-BMufdvIuBSiXKYK1qV1ofaLSZP7MhaDD4afL91g_UwCXPE41i8iP2UuNrebLy3M0-Xcu2NAycJeL9FSvTqO4LoGlJek2cP86nYTTT_A0ut_GEOGIMv8YoqPZNZeOUbLtwo4nM7ISbcPk-Soon6M-a5rYhmKOY18cLZ5XB9zEAmb6SDXepHsPpEeu6ItOn8zgjHQyxYwQ&src-supplier=Texas+Instruments, ComponentLink2URL=https://octopart.com:443/opatz8j6/c1?t=6PgF7JLWIi22LldaOU7M9y1v-cYg4Zx7_3q84e-aqucDQscnjc-S0rbNCtxfrj18GP6nvaPS8hKq6fMUxCIswLCbG2-dvnYJuWgl1rq_FtcofGa7EIOjUhmxvGKxA7uk6K91NUMs9UXrS0ReJ-JcvGY3bGLvGZ5rREyppGIXq450cGXR3FmMwE-n39kOiK-BMufdvIuBSiXKYK1qV1ofaLSZP7MhaDD4afL91g_UwCXPE41i8iP2UuNrebLy3M0-Xcu2NAycJeL9FSvTqO4LoGlJek2cP86nYTTT_A0ut_GEOGIMv8YoqPZNZeOUbLtwo4nM7ISbcPk-Soon6M-a5rYhmKOY18cLZ5XB9zEAmb6SDXepHsPpEeu6ItOn8zgjHQyxYwQ&src-supplier=Texas+Instruments, ComponentLink3Description=https://sigma.octopart.com:443/116621398/technical_drawing/Texas-Instruments-ADS1220IPWR.pdf?src-supplier=Texas+Instruments, ComponentLink3URL=https://sigma.octopart.com:443/116621398/technical_drawing/Texas-Instruments-ADS1220IPWR.pdf?src-supplier=Texas+Instruments, ComponentLink4Description=https://datasheet.octopart.com:443/ADS1220IPWR-Texas-Instruments-datasheet-37484719.pdf?src-supplier=Texas+Instruments, ComponentLink4URL=https://datasheet.octopart.com:443/ADS1220IPWR-Texas-Instruments-datasheet-37484719.pdf?src-supplier=Texas+Instruments, ComponentLink5Description=https://datasheet.octopart.com:443/ADS1220IPWR-Texas-Instruments-datasheet-16941236.pdf?src-supplier=Texas+Instruments, ComponentLink5URL=https://datasheet.octopart.com:443/ADS1220IPWR-Texas-Instruments-datasheet-16941236.pdf?src-supplier=Texas+Instruments, ComponentLink6Description=https://datasheet.octopart.com:443/ADS1220IPWR-Texas-Instruments-datasheet-15761565.pdf?src-supplier=Texas+Instruments, ComponentLink6URL=https://datasheet.octopart.com:443/ADS1220IPWR-Texas-Instruments-datasheet-15761565.pdf?src-supplier=Texas+Instruments, ComponentLink7Description=https://sigma.octopart.com:443/49249815/technical_drawing/Texas-Instruments-ADS1220IPWR.pdf?src-supplier=Texas+Instruments, ComponentLink7URL=https://sigma.octopart.com:443/49249815/technical_drawing/Texas-Instruments-ADS1220IPWR.pdf?src-supplier=Texas+Instruments, ComponentLink8Description=https://datasheet.octopart.com:443/ADS1220IPWR-Texas-Instruments-datasheet-159675426.pdf?src-supplier=SHENGYU+ELECTRONICS, ComponentLink8URL=https://datasheet.octopart.com:443/ADS1220IPWR-Texas-Instruments-datasheet-159675426.pdf?src-supplier=SHENGYU+ELECTRONICS, ComponentLink9Description=https://datasheet.octopart.com:443/ADS1220IPWR-Texas-Instruments-datasheet-165986363.pdf?src-supplier=LCSC, ComponentLink9URL=https://datasheet.octopart.com:443/ADS1220IPWR-Texas-Instruments-datasheet-165986363.pdf?src-supplier=LCSC, ComponentLink10Description=http://sigma.octopart.com:80/reach_statement/Texas-Instruments-company-64.pdf?src-supplier=Compliance+Statements, ComponentLink10URL=http://sigma.octopart.com:80/reach_statement/Texas-Instruments-company-64.pdf?src-supplier=Compliance+Statements, ComponentLink11Description=http://sigma.octopart.com:80/conflict_mineral_statement/Texas-Instruments-company-63.pdf?src-supplier=Compliance+Statements, ComponentLink11URL=http://sigma.octopart.com:80/conflict_mineral_statement/Texas-Instruments-company-63.pdf?src-supplier=Compliance+Statements, Contact Plating=Gold, Height=1.2mm, Interface=SPI, Lead Free="Lead Free", Length=5mm, Lifecycle Status=Production, Manufacturer Part Number=ADS1220IPWR, Mounting Technology="Surface Mount", Number of A/D Converters=1, Number of Analog Inputs=4, Number of Bits=24, Number of Channels=1, Number of Converters=1, Number of Elements=1, Number of Inputs=4, Pins=16, Polarity="Bipolar, Unipolar", Pricing="1=7.92, 10=6.133, 25=5.686, 100=5.1941, 250=4.95956, 500=4.81824, 1000=4.70193 (USD)", Radiation Hardening=No, Resolution=3B, RoHS=Compliant, Sampling Rate=2ksps, Schedule B=8542390000, Stock=4569, Supplier=DigiKey, Supplier 1=DigiKey, Supplier Part Number 1=296-39851-1-ND, Supply Type="Analog, Digital, Dual", Thickness=1mm, Width=4.4mm
U2 U4 U6: "3-pA on-state leakage current, 5-V, 2: 1 (SPDT), 1-channel precision multiplexer 6-SOT-23 -40 to 125", Case/Package=SOT-23, Manufacturer="Texas Instruments", Manufacturer Lifecycle Status=ACTIVE, Supplier Part Number=296-TMUX1119DBVRCT-ND, Category="Analog Switches and Multiplexers", ComponentLink1Description=https://sigma.octopart.com:443/182282880/technical_drawing/Texas-Instruments-TMUX1119DBVR.pdf?src-supplier=Texas+Instruments, ComponentLink1URL=https://sigma.octopart.com:443/182282880/technical_drawing/Texas-Instruments-TMUX1119DBVR.pdf?src-supplier=Texas+Instruments, ComponentLink2Description=https://octopart.com:443/opatz8j6/c1?t=yECAgEkYw3IrtmcYAPUg6qmtTNVur26oqu7bOUHrX4PjdCuRILzYU7NYBAOQhcHCEh7pGXbbhV7dRzS-y_krheoFYbJWFRUJnbuv9i6p_6F7rsSszCR-29LbgFxprD0A_1YADurANESAiN07S0sT7RtN2jCeaOp3CvIUB0Bo5PdEeow8fbFIgGzo96oF51yr-ojeUHaJ1WufcKjvz0ps8WKzjIL6purfuRAG7xH0VGn1P7ZxlGQD0tIKLS8oKKYj-Fz5Ea2n9r1HKmhlaJ4GaZS8DSK0gFGX7s4AbnVilZHcfV3fVg9sV4wtLmOQXeutcERFFUScrNyKsjhbrfqGSuNTPgKcDcwJj1v-ecbxAxlVkBgbaKyAS0oepKB46l8Mr7K_1Qkg&src-supplier=Texas+Instruments, ComponentLink2URL=https://octopart.com:443/opatz8j6/c1?t=yECAgEkYw3IrtmcYAPUg6qmtTNVur26oqu7bOUHrX4PjdCuRILzYU7NYBAOQhcHCEh7pGXbbhV7dRzS-y_krheoFYbJWFRUJnbuv9i6p_6F7rsSszCR-29LbgFxprD0A_1YADurANESAiN07S0sT7RtN2jCeaOp3CvIUB0Bo5PdEeow8fbFIgGzo96oF51yr-ojeUHaJ1WufcKjvz0ps8WKzjIL6purfuRAG7xH0VGn1P7ZxlGQD0tIKLS8oKKYj-Fz5Ea2n9r1HKmhlaJ4GaZS8DSK0gFGX7s4AbnVilZHcfV3fVg9sV4wtLmOQXeutcERFFUScrNyKsjhbrfqGSuNTPgKcDcwJj1v-ecbxAxlVkBgbaKyAS0oepKB46l8Mr7K_1Qkg&src-supplier=Texas+Instruments, ComponentLink3Description=https://sigma.octopart.com:443/179253514/technical_drawing/Texas-Instruments-TMUX1119DBVR.pdf?src-supplier=Texas+Instruments, ComponentLink3URL=https://sigma.octopart.com:443/179253514/technical_drawing/Texas-Instruments-TMUX1119DBVR.pdf?src-supplier=Texas+Instruments, ComponentLink4Description=https://sigma.octopart.com:443/177332312/technical_drawing/Texas-Instruments-TMUX1119DBVR.pdf?src-supplier=Texas+Instruments, ComponentLink4URL=https://sigma.octopart.com:443/177332312/technical_drawing/Texas-Instruments-TMUX1119DBVR.pdf?src-supplier=Texas+Instruments, ComponentLink5Description=https://sigma.octopart.com:443/175570407/technical_drawing/Texas-Instruments-TMUX1119DBVR.pdf?src-supplier=Texas+Instruments, ComponentLink5URL=https://sigma.octopart.com:443/175570407/technical_drawing/Texas-Instruments-TMUX1119DBVR.pdf?src-supplier=Texas+Instruments, ComponentLink6Description=https://sigma.octopart.com:443/154719501/technical_drawing/Texas-Instruments-TMUX1119DBVR.pdf?src-supplier=Texas+Instruments, ComponentLink6URL=https://sigma.octopart.com:443/154719501/technical_drawing/Texas-Instruments-TMUX1119DBVR.pdf?src-supplier=Texas+Instruments, ComponentLink7Description=https://sigma.octopart.com:443/49249327/technical_drawing/Texas-Instruments-TMUX1119DBVR.pdf?src-supplier=Texas+Instruments, ComponentLink7URL=https://sigma.octopart.com:443/49249327/technical_drawing/Texas-Instruments-TMUX1119DBVR.pdf?src-supplier=Texas+Instruments, ComponentLink8Description=https://datasheet.octopart.com:443/TMUX1119DBVR-Texas-Instruments-datasheet-179666360.pdf?src-supplier=EBEE, ComponentLink8URL=https://datasheet.octopart.com:443/TMUX1119DBVR-Texas-Instruments-datasheet-179666360.pdf?src-supplier=EBEE, ComponentLink9Description=https://datasheet.octopart.com:443/TMUX1119DBVR-Texas-Instruments-datasheet-164419629.pdf?src-supplier=Augswan, ComponentLink9URL=https://datasheet.octopart.com:443/TMUX1119DBVR-Texas-Instruments-datasheet-164419629.pdf?src-supplier=Augswan, ComponentLink10Description=http://sigma.octopart.com:80/reach_statement/Texas-Instruments-company-64.pdf?src-supplier=Compliance+Statements, ComponentLink10URL=http://sigma.octopart.com:80/reach_statement/Texas-Instruments-company-64.pdf?src-supplier=Compliance+Statements, ComponentLink11Description=http://sigma.octopart.com:80/conflict_mineral_statement/Texas-Instruments-company-63.pdf?src-supplier=Compliance+Statements, ComponentLink11URL=http://sigma.octopart.com:80/conflict_mineral_statement/Texas-Instruments-company-63.pdf?src-supplier=Compliance+Statements, Height=0m, Length=2.9mm, Lifecycle Status=Production, Manufacturer Part Number=TMUX1119DBVR, Pins=6, Pricing="1=2.28, 10=1.689, 25=1.5416, 100=1.3792, 250=1.30176, 500=1.2551, 1000=1.2167 (USD)", RoHS=Compliant, Stock=2894, Supplier=DigiKey, Supplier 1=DigiKey, Supplier Part Number 1=296-TMUX1119DBVRCT-ND, Thickness=1.2mm, Width=1.6mm